# Altium PCB PL_Remote Ghep.PcbDoc
Units mil, origin at the board's own origin, x right, y up, seen from the top; angles counter-clockwise.
Board outline 3540 x 4885 mil, 2 copper layers (Top Layer, Bottom Layer); 86 components, 0 nets, 372 pads, 50 vias.
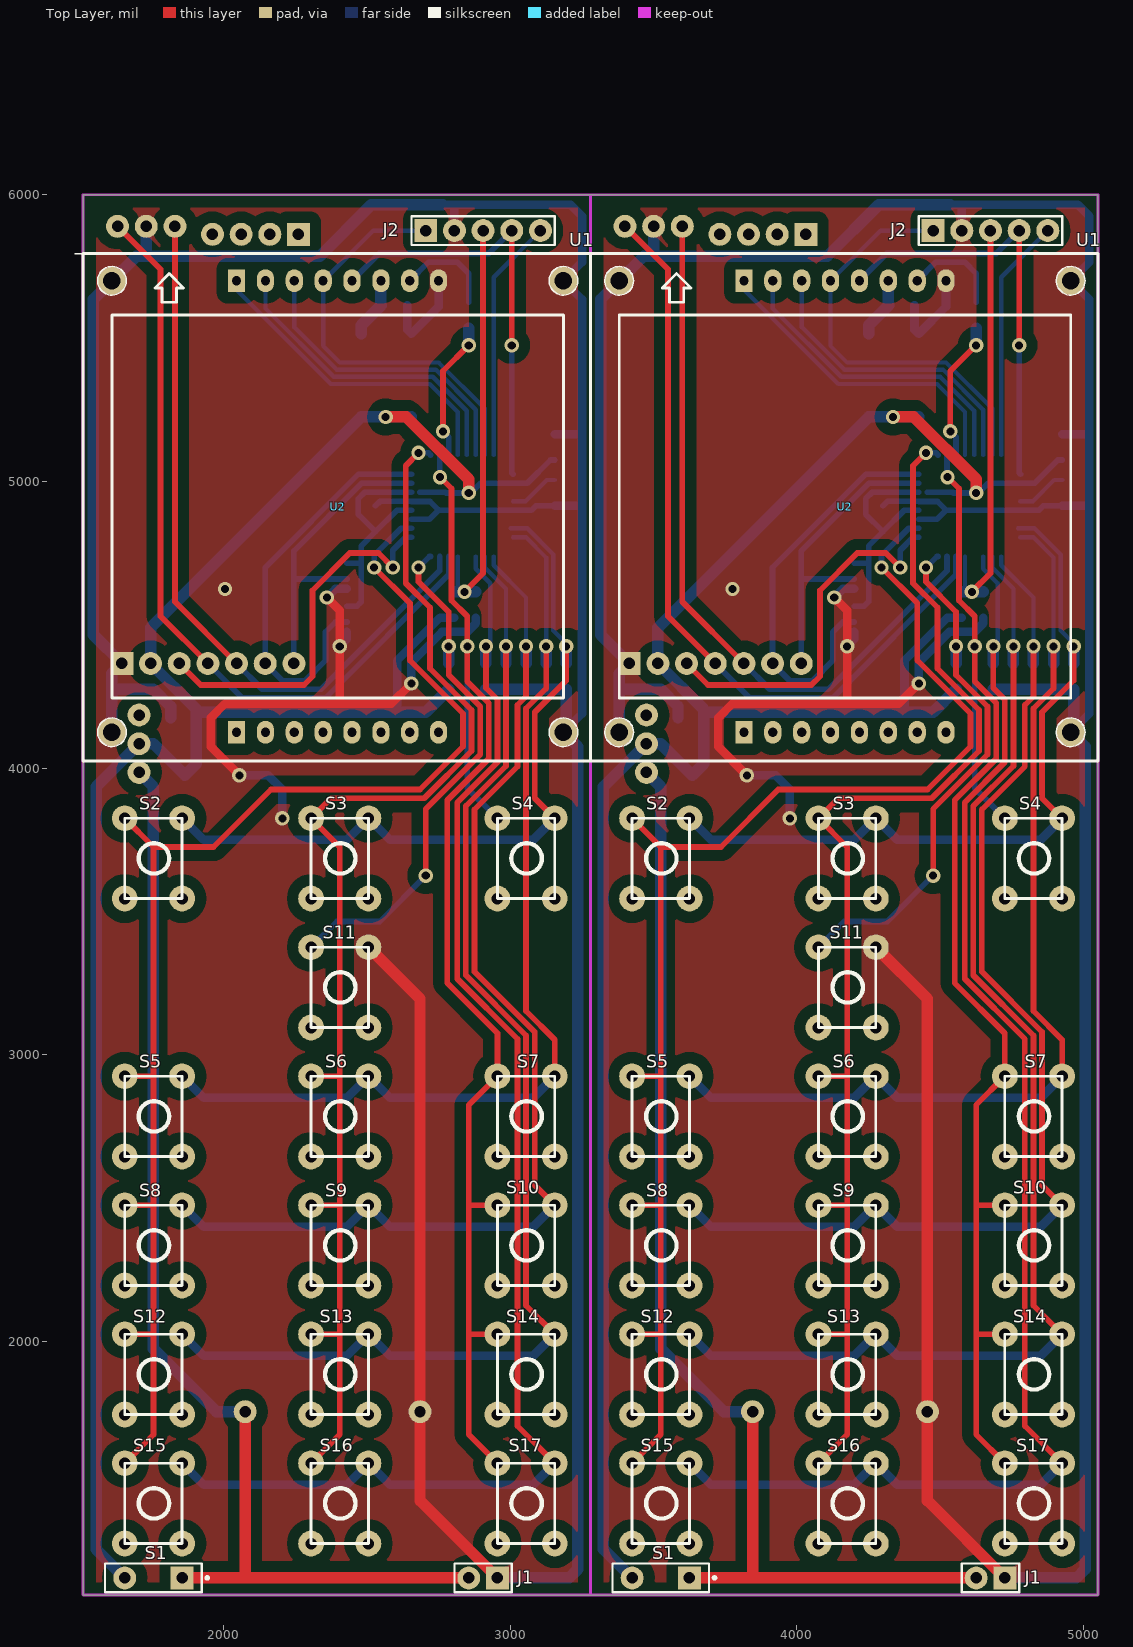
[diagram p0: Top Layer view]
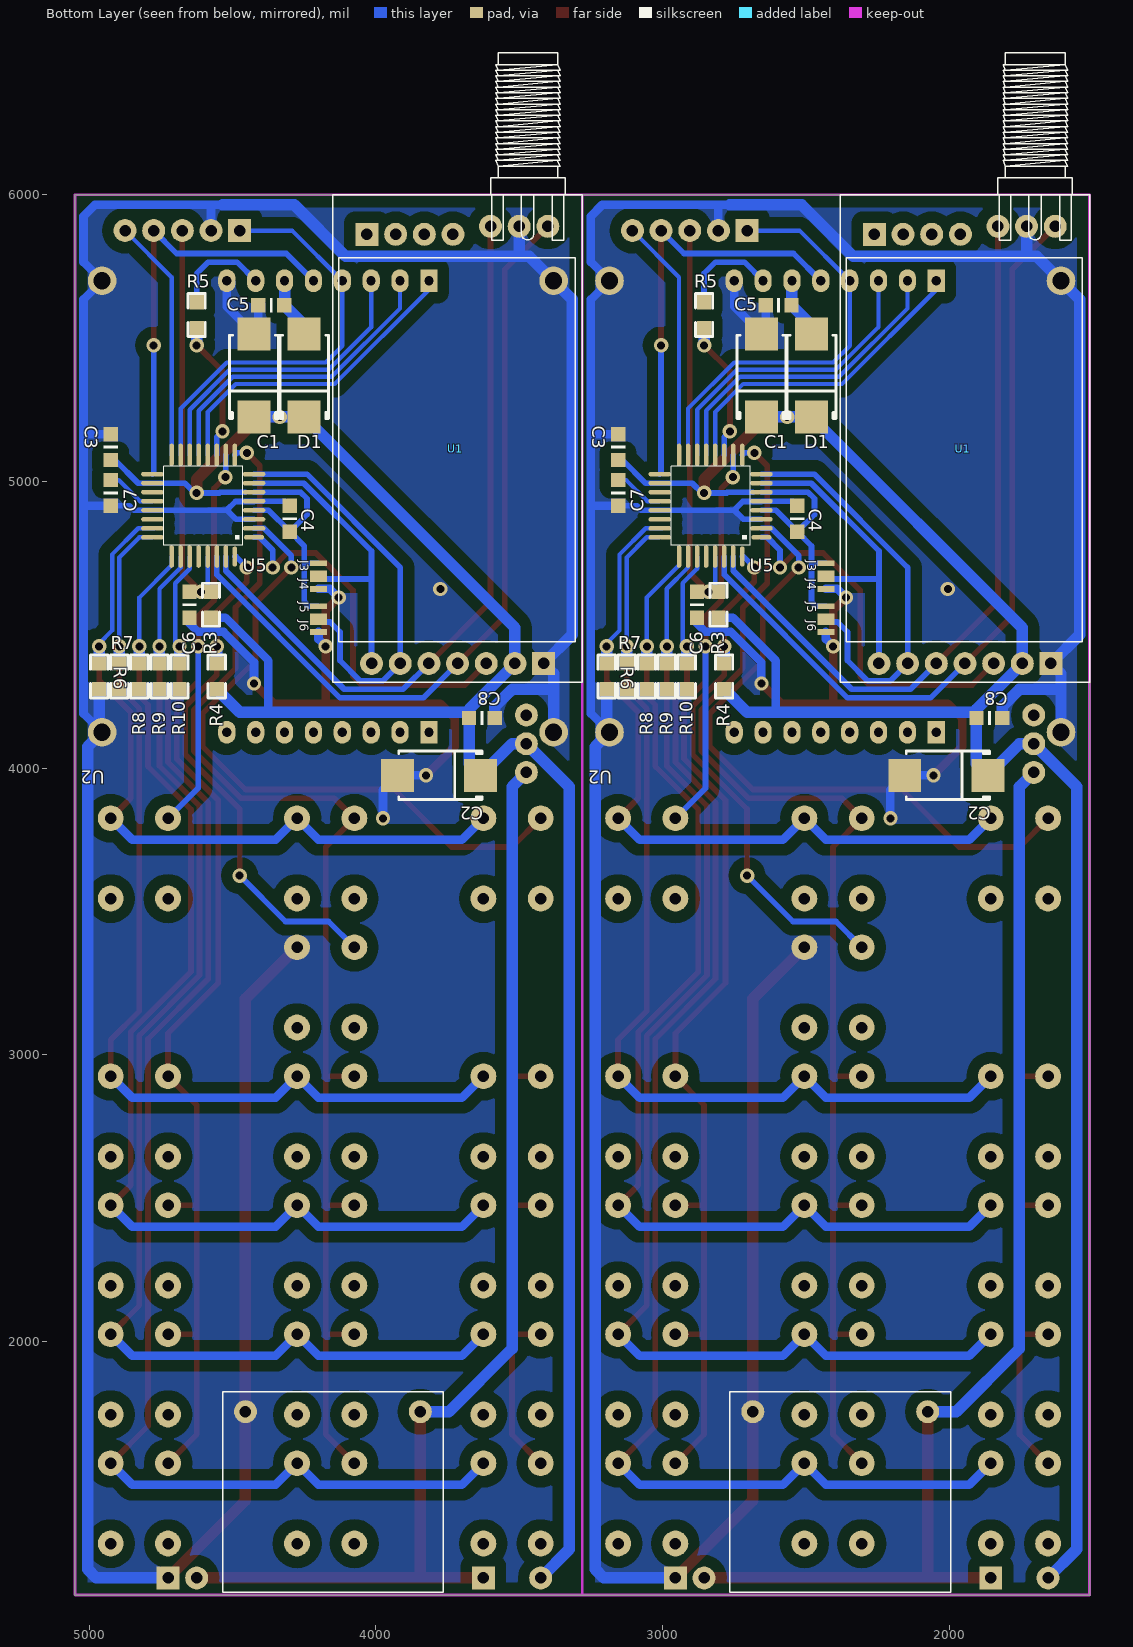
[diagram p1: Bottom Layer view, seen from below]

## Layer stack, top to bottom
Top Solder: solder mask 0.4, Solder Resist, Dk 3.5
Top Layer: signal copper 1.4
Dielectric 1: dielectric 12.6, FR-4, Dk 4.8
Bottom Layer: signal copper 1.4
Bottom Solder: solder mask 0.4, Solder Resist, Dk 3.5

## Board outline
1510,1115 5050,1115 5050,6000 1510,6000

## Design rules (kind name [scope] priority, off if disabled: settings)
Clearance [All] p1: gap=10 ignorepadtopadclearanceinfootprint=FALSE except(0: Arc-Hole Track-Hole SMDPad-Hole THPad-Hole Via-Hole Fill-Hole Poly-Hole Region-Hole Text-Hole)
PolygonConnect [All] p1: connectstyle=Relief reliefconductorwidth=10 reliefentries=4 polygonreliefangle="90 Angle" airgapwidth=10
RoutingVias [All] p1: holewidth=28 width=50 viastyle="Through Hole" minholewidth=28 minwidth=50 maxholewidth=28 maxwidth=50
SolderMaskExpansion [All] p1: expansion=4
Width [All] p1: maxlimit=10 minlimit=10 preferedwidth=10
30 further rules are at their usual default settings.

## Components (designator, comment, footprint, x,y, rotation, side; value= is the part's Value field where it differs from the comment)
C1 "Tụ hóa chân dán 107" SMC_D/WA 4425,5225 r90 bottom value=107
C1 "Tụ hóa chân dán 107" SMC_D/WA 2655,5225 r90 bottom value=107
C2 "Tụ hóa chân dán 107" SMC_E/WA 3635,3975 r0 bottom value=107
C2 "Tụ hóa chân dán 107" SMC_E/WA 1865,3975 r0 bottom value=107
C3 "Tụ điện dán 0805 104" 0805C 4925,5075 r90 bottom value=104
C3 "Tụ điện dán 0805 104" 0805C 3155,5075 r90 bottom value=104
C4 "Tụ điện dán 0805 104" 0805C 4300,4915 r270 bottom value=104
C4 "Tụ điện dán 0805 104" 0805C 2530,4915 r270 bottom value=104
C5 "Tụ điện dán 0805 104" 0805C 4320,5615 r0 bottom value=104
C5 "Tụ điện dán 0805 104" 0805C 2550,5615 r0 bottom value=104
C6 "Tụ điện dán 0805 104" 0805C 4650,4615 r270 bottom value=104
C6 "Tụ điện dán 0805 104" 0805C 2880,4615 r270 bottom value=104
C7 "Tụ điện dán 0805 104" 0805C 4925,5005 r270 bottom value=104
C7 "Tụ điện dán 0805 104" 0805C 3155,5005 r270 bottom value=104
C8 "Tụ điện dán 0805 104" 0805C 3675,4175 r180 bottom value=104
C8 "Tụ điện dán 0805 104" 0805C 1905,4175 r180 bottom value=104
D1 "Diode chân dán 1A 1N4007" SMC_D/WA 4250,5225 r90 bottom value=1N5822
D1 "Diode chân dán 1A 1N4007" SMC_D/WA 2480,5225 r90 bottom value=1N5822
J1 "Jump đực loại thẳng, 2.54mm 2P" HDR1X2 4725,1175 r180 top value=2P
J1 "Jump đực loại thẳng, 2.54mm 2P" HDR1X2 2955,1175 r180 top value=2P
J2 "Jump đực chân thẳng, 2.54mm 5P" HDR1x5 4475,5875 r0 top value=5P
J2 "Jump đực chân thẳng, 2.54mm 5P" HDR1x5 2705,5875 r0 top value=5P
J3 "Jumper 2P" XPAD 4200,4680 r90 bottom value=2P
J3 "Jumper 2P" XPAD 2430,4680 r90 bottom value=2P
J4 "Jumper 2P" XPAD 4200,4625 r90 bottom value=2P
J4 "Jumper 2P" XPAD 2430,4625 r90 bottom value=2P
J5 "Jumper 2P" XPAD 4200,4530 r90 bottom value=2P
J5 "Jumper 2P" XPAD 2430,4530 r90 bottom value=2P
J6 "Jumper 2P" XPAD 4200,4475 r90 bottom value=2P
J6 "Jumper 2P" XPAD 2430,4475 r90 bottom value=2P
R3 "Điện trở dán 0805 100K" 0805DD 4575,4615 r270 bottom value=100K
R3 "Điện trở dán 0805 100K" 0805DD 2805,4615 r270 bottom value=100K
R4 "Điện trở dán 0805 10K" 0805DD 4555,4365 r270 bottom value=10K
R4 "Điện trở dán 0805 10K" 0805DD 2785,4365 r270 bottom value=10K
R5 "Điện trở dán 0805 47R" 0805DD 4625,5625 r270 bottom value=47R
R5 "Điện trở dán 0805 47R" 0805DD 2855,5625 r270 bottom value=47R
R6 "Điện trở dán 0805 10K" 0805DD 4965,4365 r270 bottom value=10K
R6 "Điện trở dán 0805 10K" 0805DD 3195,4365 r270 bottom value=10K
R7 "Điện trở dán 0805 10K" 0805DD 4895,4365 r270 bottom value=10K
R7 "Điện trở dán 0805 10K" 0805DD 3125,4365 r270 bottom value=10K
R8 "Điện trở dán 0805 10K" 0805DD 4825,4365 r270 bottom value=10K
R8 "Điện trở dán 0805 10K" 0805DD 3055,4365 r270 bottom value=10K
R9 "Điện trở dán 0805 10K" 0805DD 4755,4365 r270 bottom value=10K
R9 "Điện trở dán 0805 10K" 0805DD 2985,4365 r270 bottom value=10K
R10 "Điện trở dán 0805 10K" 0805DD 4685,4365 r270 bottom value=10K
R10 "Điện trở dán 0805 10K" 0805DD 2915,4365 r270 bottom value=10K
S1 "Công tắc chân cắm BIT X1" SPST-2 3525,1175 r180 top value=SW_SPST
S1 "Công tắc chân cắm BIT X1" SPST-2 1755,1175 r180 top value=SW_SPST
S2 "Công tắc chip chân cắm, 4 chân 6x6x4mm" CHIP 3425,3825 r0 top value=6x6x4mm
S2 "Công tắc chip chân cắm, 4 chân 6x6x4mm" CHIP 1655,3825 r0 top value=6x6x4mm
S3 "Công tắc chip chân cắm, 4 chân 6x6x4mm" CHIP 4075,3825 r0 top value=6x6x4mm
S3 "Công tắc chip chân cắm, 4 chân 6x6x4mm" CHIP 2305,3825 r0 top value=6x6x4mm
S4 "Công tắc chip chân cắm, 4 chân 6x6x4mm" CHIP 4725,3825 r0 top value=6x6x4mm
S4 "Công tắc chip chân cắm, 4 chân 6x6x4mm" CHIP 2955,3825 r0 top value=6x6x4mm
S5 "Công tắc chip chân cắm, 4 chân 6x6x4mm" CHIP 3425,2925 r0 top value=6x6x4mm
S5 "Công tắc chip chân cắm, 4 chân 6x6x4mm" CHIP 1655,2925 r0 top value=6x6x4mm
S6 "Công tắc chip chân cắm, 4 chân 6x6x4mm" CHIP 4075,2925 r0 top value=6x6x4mm
S6 "Công tắc chip chân cắm, 4 chân 6x6x4mm" CHIP 2305,2925 r0 top value=6x6x4mm
S7 "Công tắc chip chân cắm, 4 chân 6x6x4mm" CHIP 4725,2925 r0 top value=6x6x4mm
S7 "Công tắc chip chân cắm, 4 chân 6x6x4mm" CHIP 2955,2925 r0 top value=6x6x4mm
S8 "Công tắc chip chân cắm, 4 chân 6x6x4mm" CHIP 3425,2475 r0 top value=6x6x4mm
S8 "Công tắc chip chân cắm, 4 chân 6x6x4mm" CHIP 1655,2475 r0 top value=6x6x4mm
S9 "Công tắc chip chân cắm, 4 chân 6x6x4mm" CHIP 4075,2475 r0 top value=6x6x4mm
S9 "Công tắc chip chân cắm, 4 chân 6x6x4mm" CHIP 2305,2475 r0 top value=6x6x4mm
S10 "Công tắc chip chân cắm, 4 chân 6x6x4mm" CHIP 4725,2475 r0 top value=6x6x4mm
S10 "Công tắc chip chân cắm, 4 chân 6x6x4mm" CHIP 2955,2475 r0 top value=6x6x4mm
S11 "Công tắc chip chân cắm, 4 chân 6x6x4mm" CHIP 4075,3375 r0 top value=6x6x4mm
S11 "Công tắc chip chân cắm, 4 chân 6x6x4mm" CHIP 2305,3375 r0 top value=6x6x4mm
S12 "Công tắc chip chân cắm, 4 chân 6x6x4mm" CHIP 3425,2025 r0 top value=6x6x4mm
S12 "Công tắc chip chân cắm, 4 chân 6x6x4mm" CHIP 1655,2025 r0 top value=6x6x4mm
S13 "Công tắc chip chân cắm, 4 chân 6x6x4mm" CHIP 4075,2025 r0 top value=6x6x4mm
S13 "Công tắc chip chân cắm, 4 chân 6x6x4mm" CHIP 2305,2025 r0 top value=6x6x4mm
S14 "Công tắc chip chân cắm, 4 chân 6x6x4mm" CHIP 4725,2025 r0 top value=6x6x4mm
S14 "Công tắc chip chân cắm, 4 chân 6x6x4mm" CHIP 2955,2025 r0 top value=6x6x4mm
S15 "Công tắc chip chân cắm, 4 chân 6x6x4mm" CHIP 3425,1575 r0 top value=6x6x4mm
S15 "Công tắc chip chân cắm, 4 chân 6x6x4mm" CHIP 1655,1575 r0 top value=6x6x4mm
S16 "Công tắc chip chân cắm, 4 chân 6x6x4mm" CHIP 4075,1575 r0 top value=6x6x4mm
S16 "Công tắc chip chân cắm, 4 chân 6x6x4mm" CHIP 2305,1575 r0 top value=6x6x4mm
S17 "Công tắc chip chân cắm, 4 chân 6x6x4mm" CHIP 4725,1575 r0 top value=6x6x4mm
S17 "Công tắc chip chân cắm, 4 chân 6x6x4mm" CHIP 2955,1575 r0 top value=6x6x4mm
U1 "Module thu phát không dây RF E32-TTL-1W" RF_AS32 3415,4365 r90 bottom value=E32-TTL-1W
U1 "Module thu phát không dây RF E32-TTL-1W" RF_AS32 1645,4365 r90 bottom value=E32-TTL-1W
U2 "LCD NOKIA 5110" NOKIA5110T 3280,4025 r0 top
U2 "LCD NOKIA 5110" NOKIA5110T 1510,4025 r0 top
U5 "Vi điều khiển ATMEL chân dán ATMEGA8" ATMEGA8 4425,4805 r90 bottom value=ATMEGA8
U5 "Vi điều khiển ATMEL chân dán ATMEGA8" ATMEGA8 2655,4805 r90 bottom value=ATMEGA8

## Footprints (in the part's own frame and the unit in brackets; to place one, negate y for a bottom-side part, rotate by r counter-clockwise, add the part's x,y. Pads: shape width x height; smd on the part's side, far side on the other; paste and mask are expansions set on the pad)
0805C [mil]
  rect 50x50 smd: 1(0,0) 2(90,0)
  silkscreen extent 40,-25 50,25, body extent 6,-25 84,25, height 31
0805DD [mil]
  rect 50x50 smd: 1(0,0) 2(90,0)
  silkscreen extent -30,-30 120,30, body extent 4,-25 82,25, height 31
ATMEGA8 [mm]
  oval 0.4x1.778 smd: 1(0,0)
  oval 0.4x2 smd: 2(0.8,0) 3(1.6,0) 4(2.4,0) 5(3.2,0) 6(4,0) 7(4.8,0) 8(5.6,0) 17(5.6,9) 18(4.8,9) 19(4,9) 20(3.2,9) 21(2.4,9) 22(1.6,9) 23(0.8,9) 24(0,9)
  oval 2x0.4 smd: 9(7.3,1.7) 10(7.3,2.5) 11(7.3,3.3) 12(7.3,4.1) 13(7.3,4.9) 14(7.3,5.7) 15(7.3,6.5) 16(7.3,7.3) 25(-1.7,7.3) 26(-1.7,6.5) 27(-1.7,5.7) 28(-1.7,4.9) 29(-1.7,4.1) 30(-1.7,3.3) 31(-1.7,2.5)
  oval 1.778x0.4 smd: 32(-1.7,1.7)
  silkscreen extent -0.7,1 6.3,8, body extent -1.72,0 7.29,9.02, height 1.15
CHIP [mil]
  round 90 hole 40: 1(0,0) 2(200,0) 3(0,-280) 4(200,-280)
  silkscreen extent 0,-280 200,0, body extent -16,-303 220,20, height 375
HDR1X2 [mil] "Connector; Header; 2 Position"
  rect 80x80 hole 40: 1(0,0)
  round 80 hole 40: 2(100,0)
  silkscreen extent -50,-50 150,50
HDR1x5 [mil] "Connector; Header; 5 Position"
  rect 80x80 hole 40: 1(0,0)
  round 80 hole 40: 2(100,0) 3(200,0) 4(300,0) 5(400,0)
  silkscreen extent -50,-50 450,50
NOKIA5110T [mil]
  round 100 hole 60: 0(100,100) 0(100,1675) 0(1675,100) 0(1675,1675)
  rect 60x80 hole 32: 0(535,100) 1(535,1675)
  oval 60x80 hole 32: 0(635.71,100) 0(736.43,100) 0(837.14,100) 0(937.86,100) 0(1038.57,100) 0(1139.29,100) 0(1240,100) 2(635.71,1675) 3(736.43,1675) 4(837.14,1675) 5(937.86,1675) 6(1038.57,1675) 7(1139.29,1675) 8(1240,1675)
  silkscreen extent 0,0 1770,1770, body extent -2,-2 1770,1770, height 277
RF_AS32 [mil]
  round 80 hole 40: 0(1497,316) 0(1497,416) 0(1497,516) 2(0,100) 3(0,200) 4(0,300) 5(0,400) 6(0,500) 7(0,600)
  rect 80x80 hole 40: 0(1497,616) 1(0,0)
  silkscreen extent -65,-135 2130,735, body extent -68,-154 2136,752, height 532
SMC_D/WA [mil]
  rect 115x115 smd: 1(0,0) 2(290,0)
  silkscreen extent -5,-85 285,85, body extent 1,-84 289,85, height 75
SMC_E/WA [mil]
  rect 115x115 smd: 1(0,0) 2(290,0)
  silkscreen extent -5,-85 285,85, body extent 1,-85 289,84, height 75
SPST-2 [mil] "Switch; 2 Leads"
  rect 80x80 hole 40: 1(-100,0)
  round 80 hole 40: 2(100,0)
  silkscreen extent -192,-50 169,50
XPAD [mil]
  rect 20x60 smd: 1(0,0) 2(35,0)

## Part data
C1 C1 C2 C2: library part "Cap Pol1", "Polarized Capacitor (Radial)", Type1="T? hóa chân c?m", Type2="T? hóa chân dán"
C3 C3 C4 C4 C5 C5 C6 C6 C7 C7 C8 C8: library part CAP, Type1="T? di?n dán 0805", Type2="T? di?n chân c?m"
D1 D1: library part DIODE, Value2=1N4007, Type1="Diode xung chân c?m 3A", Type2="Diode ch?nh luu chân c?m 1A", Type3="Diode ch?nh luu chân c?m 3A", Type4="Diode chân dán 1A"
J1 J1 J3 J3 J4 J4 J5 J5 J6 J6: library part CON2, Type1="Gi?c xanh lo?i n?m, 300V/16A - 5.08mm", Type2="Jump d?c lo?i th?ng, 2.54mm", Type3=Jumper, Type4="Gi?c xanh lo?i n?m, 300V/16A - 3.81mm"
J2 J2: library part CON5, "Connector"
R3 R3 R4 R4 R5 R5 R6 R6 R7 R7 R8 R8 R9 R9 R10 R10: library part "RES semi", "Semiconductor Resistor", Type1="Ði?n tr? dán 0805", Type2="Ði?n tr? chân c?m 1/4W", Type3="Ði?n tr? chân c?m 2W"
S1 S1: library part SW-SPST, "Single-Pole, Single-Throw Switch", LatestRevisionDate=17-Jul-2002, LatestRevisionNote="Re-released for DXP Platform.", PackageDescription="Switch; 2 Leads", PackageReference=SPST-2, Published=24-Mar-1999, Publisher="Altium Limited"
S2 S2 S3 S3 S4 S4 S5 S5 S6 S6 S7 S7 S8 S8 S9 S9 S10 S10 S11 S11 S12 S12 S13 S13 S14 S14 S15 S15 S16 S16 S17 S17: library part SW-PB, Type1="Công t?c chip chân c?m, 4 chân"
U1 U1: library part AS32-TTL-1W, "AS32-TTL-1W", Type1="Module thu phát không dây RF"
U5 U5: library part ATMEGA8-A, "TQFP package", Type1="Vi di?u khi?n ATMEL chân dán"

## Free pads (board coordinates)
  round 80 hole 40: 0(1630,5890) 0(1730,5890) 0(1830,5890) 0(3400,5890) 0(3500,5890) 0(3600,5890) 1(2685,1755) 1(4455,1755) 2(2075,1755) 2(3845,1755) 4(1705,4185) 4(3475,4185) 5(1705,4085) 5(3475,4085) 6(1705,3985) 6(3475,3985)

## Via types
v1: diameter 50, hole 28, Top Layer to Bottom Layer, 50 vias

## Nets (pads, with @x,y where several pads share a name; then routed paths per layer and width w, separated by ;. In a path a pad name is that pad's centre, name@x,y a point inside that pad or via, vN(x,y) a via of type N, cw(c..) or ccw(c..) an arc to the next point about the centre after c; other vN are vias at no path point)
pads on no net: C1.1 C1.2 C2.1 C2.2 C3.1 C3.2 C4.1 C4.2 C5.1 C5.2 C6.1 C6.2 C7.1 C7.2 C8.1 C8.2 D1.1 D1.2 J1.1 J1.2 J2.1 J2.2 J2.3 J2.4 J2.5 J3.1 J3.2 J4.1 J4.2 J5.1 J5.2 J6.1 J6.2 R3.1 R3.2 R4.1 R4.2 R5.1 R5.2 R6.1 R6.2 R7.1 R7.2 R8.1 R8.2 R9.1 R9.2 R10.1 R10.2 S1.1 S1.2 S2.1 S2.2 S2.3 S2.4 S3.1 S3.2 S3.3 S3.4 S4.1 S4.2 S4.3 S4.4 S5.1 S5.2 S5.3 S5.4 S6.1 S6.2 S6.3 S6.4 S7.1 S7.2 S7.3 S7.4 S8.1 S8.2 S8.3 S8.4 S9.1 S9.2 S9.3 S9.4 S10.1 S10.2 S10.3 S10.4 S11.1 S11.2 S11.3 S11.4 S12.1 S12.2 S12.3 S12.4 S13.1 S13.2 S13.3 S13.4 S14.1 S14.2 S14.3 S14.4 S15.1 S15.2 S15.3 S15.4 S16.1 S16.2 S16.3 S16.4 S17.1 S17.2 S17.3 S17.4 U1.0 U1.1 U1.2 U1.3 U1.4 U1.5 U1.6 U1.7 U2.0 U2.1 U2.2 U2.3 U2.4 U2.5 U2.6 U2.7 U2.8 U5.1 U5.2 U5.3 U5.4 U5.5 U5.6 U5.7 U5.8 U5.9 U5.10 U5.11 U5.12 U5.13 U5.14 U5.15 U5.16 U5.17 U5.18 U5.19 U5.20 U5.21 U5.22 U5.23 U5.24 U5.25 U5.26 U5.27 U5.28 U5.29 U5.30 U5.31 U5.32
copper on no net: | length 163618
  Top Layer w20: 1630,5890 1780,5740 1780,4530 1945,4365 ; 1655,1575 1755,1675 1755,2025 ; 1655,2025 1755,2025 ; 1655,2475 1750,2475 1755,2470 ; 1655,2925 1750,2925 1755,2930 ; 1655,3825 1755,3725 ; 1830,5890 1830,4580 2045,4365 ; 1845,4365 1920,4290 2280,4290 2310,4320 2310,4620 2440,4750 2540,4750 v1(2590,4700) ; 2305,1575 2405,1675 2405,2025 ; 2305,2025 2405,2025 ; 2305,2475 2405,2475 ; 2305,2925 2405,2925 ; v1@2530,4700 v1(2525,4700) 2650,4575 2650,4375 2835,4190 2835,4075 2685,3925 2165,3925 1965,3725 1755,3725 ; v1(2680,4700) 2680,4650 2785,4545 v1(2785,4425) 2785,4324.85 2895,4214.85 2895,4047.57 2705,3857.57 v1(2705,3625) ; v1(2680,5100) 2635,5055 2635,4645 2720,4560 2720,4347.43 2865,4202.43 2865,4060 2700,3895 2375,3895 2305,3825 2405,3725 2405,2925 ; v1(2755,5015) 2795,4975 2795,4585 2850,4530 v1(2850,4425) 2850,4302.28 2925,4227.28 2925,4032.57 2780,3887.57 2780,3250 2955,3075 2955,2925 2855,2825 2855,2475 ; v1(2765,5175) 2765,5385 v1(2855,5475) ; v1(2840,4615) 2905,4680 2905,5875 ; v1(2915,4425) 2915,4279.71 2955,4239.71 2955,4020.15 2815,3880.15 2815,3265 3025,3055 3025,1705 3155,1575 ; 2955,1575 2855,1675 2855,2025 ; 2955,2025 2855,2025 ; 2955,2475 2855,2475 ; v1(2985,4425) 2985,4007.72 2845,3867.72 2845,3277.43 3055,3067.43 3055,2125 3155,2025 ; v1(3005,5475) 3005,5875 ; v1(3055,4425) 3055,4250 3025,4220 3025,4005.29 2875,3855.29 2875,3289.85 3085,3079.85 3085,2545 3155,2475 ; v1(3125,4425) 3125,4277.57 3055,4207.57 3055,3152.28 3155,3052.28 3155,2925 ; 3155,3825 3085,3895 3085,4195.15 3195,4305.15 v1(3195,4425) ; 3400,5890 3550,5740 3550,4530 3715,4365 ; 3425,1575 3525,1675 3525,2025 ; 3425,2025 3525,2025 ; 3425,2475 3520,2475 3525,2470 ; 3425,2925 3520,2925 3525,2930 ; 3425,3825 3525,3725 ; 3600,5890 3600,4580 3815,4365 ; 3615,4365 3690,4290 4050,4290 4080,4320 4080,4620 4210,4750 4310,4750 v1(4360,4700) ; 4075,1575 4175,1675 4175,2025 ; 4075,2025 4175,2025 ; 4075,2475 4175,2475 ; 4075,2925 4175,2925 ; v1@4300,4700 v1(4295,4700) 4420,4575 4420,4375 4605,4190 4605,4075 4455,3925 3935,3925 3735,3725 3525,3725 ; v1(4450,4700) 4450,4650 4555,4545 v1(4555,4425) 4555,4324.85 4665,4214.85 4665,4047.57 4475,3857.57 v1(4475,3625) ; v1(4450,5100) 4405,5055 4405,4645 4490,4560 4490,4347.43 4635,4202.43 4635,4060 4470,3895 4145,3895 4075,3825 4175,3725 4175,2925 ; v1(4525,5015) 4565,4975 4565,4585 4620,4530 v1(4620,4425) 4620,4302.28 4695,4227.28 4695,4032.57 4550,3887.57 4550,3250 4725,3075 4725,2925 4625,2825 4625,2475 ; v1(4535,5175) 4535,5385 v1(4625,5475) ; v1(4610,4615) 4675,4680 4675,5875 ; v1(4685,4425) 4685,4279.71 4725,4239.71 4725,4020.15 4585,3880.15 4585,3265 4795,3055 4795,1705 4925,1575 ; 4725,1575 4625,1675 4625,2025 ; 4725,2025 4625,2025 ; 4725,2475 4625,2475 ; v1(4755,4425) 4755,4007.72 4615,3867.72 4615,3277.43 4825,3067.43 4825,2125 4925,2025 ; v1(4775,5475) 4775,5875 ; v1(4825,4425) 4825,4250 4795,4220 4795,4005.29 4645,3855.29 4645,3289.85 4855,3079.85 4855,2545 4925,2475 ; v1(4895,4425) 4895,4277.57 4825,4207.57 4825,3152.28 4925,3052.28 4925,2925 ; 4925,3825 4855,3895 4855,4195.15 4965,4305.15 v1(4965,4425) ; 1755,2025 1755,2470 ; 1755,2470 1755,2930 ; 1755,2930 1755,3725 ; 2405,2025 2405,2475 ; 2405,2475 2405,2925 ; 2855,2025 2855,2475 ; 3525,2025 3525,2470 ; 3525,2470 3525,2930 ; 3525,2930 3525,3725 ; 4175,2025 4175,2475 ; 4175,2475 4175,2925 ; 4625,2025 4625,2475
  Top Layer w30: v1(2055,3975) 1955,4075 1955,4175 2005,4225 2405,4225 ; v1(2360,4595) 2405,4550 v1(2405,4425) 2405,4225 ; v1(2655,4295) 2585,4225 2405,4225 ; v1(3825,3975) 3725,4075 3725,4175 3775,4225 4175,4225 ; v1(4130,4595) 4175,4550 v1(4175,4425) 4175,4225 ; v1(4425,4295) 4355,4225 4175,4225
  Top Layer w40: 1855,1175 2855,1175 ; 2075,1175 2075,1755 ; 2505,3375 2685,3195 2685,1755 2685,1445 2955,1175 ; v1(2565,5225) 2637.22,5225 2855,5007.22 v1(2855,4960) ; 3625,1175 4625,1175 ; 3845,1175 3845,1755 ; 4275,3375 4455,3195 4455,1755 4455,1445 4725,1175 ; v1(4335,5225) 4407.22,5225 4625,5007.22 v1(4625,4960)
  Bottom Layer w15: 2045,5700 2045,5668.93 2373.93,5340 2718.93,5340 2816.42,5242.52 2816.42,5092.4 ; 2145.71,5700 2145.71,5603.58 2384.29,5365 2729.29,5365 2847.91,5246.38 2847.91,5092.4 ; 2246.43,5700 2246.43,5538.22 2394.64,5390 2739.64,5390 2879.41,5250.24 2879.41,5092.4 ; 2705,5875 2522.14,5875 2347.14,5700 2347.14,5472.86 2405,5415 2750,5415 2910.91,5254.09 2910.91,5092.4 ; 2807.84,4615 2816.42,4606.42 2816.42,4738.07 ; 2879.41,4738.07 2879.41,4695.59 2930,4645 2930,4440 v1(2915,4425) ; 2910.91,4738.07 2910.91,4699.45 2985,4625.36 v1(2985,4425) ; 2942.4,4738.07 2942.4,4707.6 3055,4595 v1(3055,4425) ; 2942.4,5092.4 2942.4,5712.4 3105,5875 ; 3001.12,4836.5 3058.86,4836.5 3150,4745.36 3150,4480 3195,4435 v1(3195,4425) ; 3009.33,4805 3055,4805 3125,4735 v1(3125,4425) ; 3009.33,4930.98 3052.98,4930.98 3127,5005 3155,5005 ; 3815,5700 3815,5668.93 4143.93,5340 4488.93,5340 4586.42,5242.52 4586.42,5092.4 ; 3915.71,5700 3915.71,5603.58 4154.29,5365 4499.29,5365 4617.91,5246.38 4617.91,5092.4 ; 4016.43,5700 4016.43,5538.22 4164.64,5390 4509.64,5390 4649.41,5250.24 4649.41,5092.4 ; 4475,5875 4292.14,5875 4117.14,5700 4117.14,5472.86 4175,5415 4520,5415 4680.91,5254.09 4680.91,5092.4 ; 4577.84,4615 4586.42,4606.42 4586.42,4738.07 ; 4649.41,4738.07 4649.41,4695.59 4700,4645 4700,4440 v1(4685,4425) ; 4680.91,4738.07 4680.91,4699.45 4755,4625.36 v1(4755,4425) ; 4712.4,4738.07 4712.4,4707.6 4825,4595 v1(4825,4425) ; 4712.4,5092.4 4712.4,5712.4 4875,5875 ; 4771.12,4836.5 4828.86,4836.5 4920,4745.36 4920,4480 4965,4435 v1(4965,4425) ; 4779.33,4805 4825,4805 4895,4735 v1(4895,4425) ; 4779.33,4930.98 4822.98,4930.98 4897,5005 4925,5005
  Bottom Layer w20: 1945,4365 2065,4245 2355,4245 2784.92,4674.92 2784.92,4738.07 ; 2045,4365 2135,4275 2340,4275 2753.43,4688.43 2753.43,4738.07 ; 2245,4365 2245,4665 ; 2305,3375 2395,3465 2545,3465 v1(2705,3625) ; 2430,4510 2390,4510 2355,4475 2355,4375 2285,4305 2205,4305 2145,4365 2145,4700 2470.47,5025.47 2655,5025.47 ; 2430,4565 2465,4565 2480,4580 2480,4715 ; 2430,4660 2250,4660 2245,4665 ; 2430,4715 2480,4715 ; 2447.86,5700 2542.86,5795 2925,5795 3005,5875 ; v1(2525,4700) 2525,4741.72 2619.78,4836.5 2655,4836.5 ; 2530,4915 2545.98,4930.98 2655,4930.98 ; v1(2590,4700) 2590,4760 2635,4805 2655,4805 ; 2649.29,5700 2714.29,5765 2815,5765 2855,5725 2855,5625 ; 2655,4867.99 2717.99,4867.99 2749.49,4899.49 3074,4899.49 3089.51,4915 3155,4915 ; 2655,4899.49 2604.49,4899.49 2530,4825 ; 2655,4962.48 2492.48,4962.48 2470,4940 2470,4885 2530,4825 ; 2655,4993.98 2481.4,4993.98 2245,4757.57 2245,4665 ; 2655.98,4930 2720,4930 2750,4900 ; v1(2680,4700) 2718.07,4738.07 2721.93,4738.07 ; v1(2680,5100) 2714.33,5100 2721.93,5092.4 ; 2684.37,4962.48 2773.88,4962.48 2776.36,4960 v1(2855,4960) 2862.24,4960 2896.21,4993.98 3009.33,4993.98 3058.98,4993.98 3140,5075 3155,5075 ; 2753.43,5092.4 2753.43,5016.57 v1(2755,5015) ; v1(2765,5175) 2784.92,5155.08 2784.92,5092.4 ; v1(2850,4425) 2850,3930 2955,3825 ; v1(3005,5475) 3005,5029.8 3009.33,5025.47 ; 3715,4365 3835,4245 4125,4245 4554.92,4674.92 4554.92,4738.07 ; 3815,4365 3905,4275 4110,4275 4523.43,4688.43 4523.43,4738.07 ; 4015,4365 4015,4665 ; 4075,3375 4165,3465 4315,3465 v1(4475,3625) ; 4200,4510 4160,4510 4125,4475 4125,4375 4055,4305 3975,4305 3915,4365 3915,4700 4240.47,5025.47 4425,5025.47 ; 4200,4565 4235,4565 4250,4580 4250,4715 ; 4200,4660 4020,4660 4015,4665 ; 4200,4715 4250,4715 ; 4217.86,5700 4312.86,5795 4695,5795 4775,5875 ; v1(4295,4700) 4295,4741.72 4389.78,4836.5 4425,4836.5 ; 4300,4915 4315.98,4930.98 4425,4930.98 ; v1(4360,4700) 4360,4760 4405,4805 4425,4805 ; 4419.29,5700 4484.29,5765 4585,5765 4625,5725 4625,5625 ; 4425,4867.99 4487.99,4867.99 4519.49,4899.49 4844,4899.49 4859.51,4915 4925,4915 ; 4425,4899.49 4374.49,4899.49 4300,4825 ; 4425,4962.48 4262.48,4962.48 4240,4940 4240,4885 4300,4825 ; 4425,4993.98 4251.4,4993.98 4015,4757.57 4015,4665 ; 4425.98,4930 4490,4930 4520,4900 ; v1(4450,4700) 4488.07,4738.07 4491.93,4738.07 ; v1(4450,5100) 4484.33,5100 4491.93,5092.4 ; 4454.37,4962.48 4543.88,4962.48 4546.36,4960 v1(4625,4960) 4632.24,4960 4666.21,4993.98 4779.33,4993.98 4828.98,4993.98 4910,5075 4925,5075 ; 4523.43,5092.4 4523.43,5016.57 v1(4525,5015) ; v1(4535,5175) 4554.92,5155.08 4554.92,5092.4 ; v1(4620,4425) 4620,3930 4725,3825 ; v1(4775,5475) 4775,5029.8 4779.33,5025.47 ; 2480,4715 2480,4775 2530,4825 ; 4250,4715 4250,4775 4300,4825
  Bottom Layer w30: 1855,1575 1930,1500 2430,1500 2505,1575 2580,1500 3080,1500 3155,1575 ; 1855,2025 1930,1950 2430,1950 2505,2025 2580,1950 3080,1950 3155,2025 ; 1855,2475 1930,2400 2430,2400 2505,2475 2580,2400 3080,2400 3155,2475 ; 1855,2925 1930,2850 2430,2850 2505,2925 2580,2850 3080,2850 3155,2925 ; 1855,3825 1930,3750 2430,3750 2505,3825 2580,3750 3080,3750 3155,3825 ; v1(2055,3975) 2155,3975 2205,3925 v1(2205,3825) ; v1(2360,4595) 2390,4625 2430,4625 ; v1(2405,4425) 2430,4450 2430,4475 ; 2605,4195 2605,4375 2755,4525 2805,4525 ; 2640,5615 2640,5530 2655,5515 2750,5610 2750,5700 ; v1(2655,4295) 2655,4368.43 2761.57,4475 2850,4475 2880,4505 2880,4525 ; 2765,5965 2805,5965 ; 2805,5875 2805,5965 ; 3155,4915 3250,4915 ; 3155,5165 3250,5165 ; 3185,4125 3195,4135 3250,4190 3250,4915 ; 3625,1575 3700,1500 4200,1500 4275,1575 4350,1500 4850,1500 4925,1575 ; 3625,2025 3700,1950 4200,1950 4275,2025 4350,1950 4850,1950 4925,2025 ; 3625,2475 3700,2400 4200,2400 4275,2475 4350,2400 4850,2400 4925,2475 ; 3625,2925 3700,2850 4200,2850 4275,2925 4350,2850 4850,2850 4925,2925 ; 3625,3825 3700,3750 4200,3750 4275,3825 4350,3750 4850,3750 4925,3825 ; v1(3825,3975) 3925,3975 3975,3925 v1(3975,3825) ; v1(4130,4595) 4160,4625 4200,4625 ; v1(4175,4425) 4200,4450 4200,4475 ; 4375,4195 4375,4375 4525,4525 4575,4525 ; 4410,5615 4410,5530 4425,5515 4520,5610 4520,5700 ; v1(4425,4295) 4425,4368.43 4531.57,4475 4620,4475 4650,4505 4650,4525 ; 4535,5965 4575,5965 ; 4575,5875 4575,5965 ; 4925,4915 5020,4915 ; 4925,5165 5020,5165 ; 4955,4125 4965,4135 5020,4190 5020,4915 ; 2805,5965 3210,5965 3250,5925 3250,5765 3185,5700 3250,5635 3250,5165 ; 3250,4915 3250,5165 ; 4575,5965 4980,5965 5020,5925 5020,5765 4955,5700 5020,5635 5020,5165 ; 5020,4915 5020,5165
  Bottom Layer w40: 1610,4125 1610,4275 ; 1655,1175 1555,1275 1555,3935 1705,4085 1755,4085 1865,3975 1905,4015 1905,4175 1905,4195 2705,4195 2785,4275 ; 1705,3985 1755,3935 1755,1975 1975,1755 2075,1755 ; 1730,5890 1730,5785 ; 1815,4175 1815,4215 1755,4275 1610,4275 ; 1905,4205 1745,4365 1745,4490 2480,5225 v1(2565,5225) 2655,5225 ; 2480,5515 2480,5545 2550,5615 2548.57,5616.43 2548.57,5700 ; 2765,5965 2515,5965 2335,5785 1730,5785 ; 2785,4365 v1(2785,4425) ; 2807.84,4615 2880,4615 ; v1(2855,5475) 2855,5535 ; 2915,4275 2985,4275 3055,4275 3125,4275 3195,4275 3195,4135 ; 2915,4365 v1(2915,4425) ; 2955,1175 3205,1175 3235,1205 3235,4075 3185,4125 ; 2985,4365 v1(2985,4425) ; 3055,4365 v1(3055,4425) ; 3125,4365 v1(3125,4425) ; 3195,4365 v1(3195,4425) ; 3380,4125 3380,4275 ; 3425,1175 3325,1275 3325,3935 3475,4085 3525,4085 3635,3975 3675,4015 3675,4175 3675,4195 4475,4195 4555,4275 ; 3475,3985 3525,3935 3525,1975 3745,1755 3845,1755 ; 3500,5890 3500,5785 ; 3585,4175 3585,4215 3525,4275 3380,4275 ; 3675,4205 3515,4365 3515,4490 4250,5225 v1(4335,5225) 4425,5225 ; 4250,5515 4250,5545 4320,5615 4318.57,5616.43 4318.57,5700 ; 4535,5965 4285,5965 4105,5785 3500,5785 ; 4555,4365 v1(4555,4425) ; 4577.84,4615 4650,4615 ; v1(4625,5475) 4625,5535 ; 4685,4275 4755,4275 4825,4275 4895,4275 4965,4275 4965,4135 ; 4685,4365 v1(4685,4425) ; 4725,1175 4975,1175 5005,1205 5005,4075 4955,4125 ; 4755,4365 v1(4755,4425) ; 4825,4365 v1(4825,4425) ; 4895,4365 v1(4895,4425) ; 4965,4365 v1(4965,4425) ; 1610,4275 1610,4330 1645,4365 1545,4465 1545,5635 1610,5700 1695,5785 1730,5785 ; 3380,4275 3380,4330 3415,4365 3315,4465 3315,5635 3380,5700 3465,5785 3500,5785
  other v1: 2005,4625 3775,4625

## Polygon pours and split planes (outlines as drawn)
no net on Bottom Layer "Top Layer-No Net" (solid, remove dead copper, pour order 24): 3280,6000 5050,6000 5050,1115 3280,1115 3280,6000
no net on Bottom Layer "Top Layer-No Net" (solid, remove dead copper, pour order 20): 1510,6000 3280,6000 3280,1115 1510,1115 1510,6000
no net on Top Layer "Top Layer-No Net" (solid, remove dead copper, pour order 26): 3280,6000 5050,6000 5050,1115 3280,1115 3280,6000
no net on Top Layer "Top Layer-No Net" (solid, remove dead copper, pour order 22): 1510,6000 3280,6000 3280,1115 1510,1115 1510,6000

## Keep-outs
Keep-Out Layer:
  lines w10: 3280,1115 3280,6000 ; 3280,1115 5050,1115 5050,6000 3280,6000 ; 3280,1115 1510,1115 1510,6000 3280,6000 ; 3280,1115 3280,6000

## Silkscreen, mask and mechanical layers (free items; w line width, h text height)
Top Overlay:
  lines w5: 1481,5795 1510,5795 ; 3251,5795 3280,5795
Bottom Overlay:
  lines w5: 1995,1125 1995,1825 2765,1825 2765,1125 1995,1125 ; 3765,1125 3765,1825 4535,1825 4535,1125 3765,1125